# EAGLE board source_eagle (EAGLE 9.3.2)
REV: A
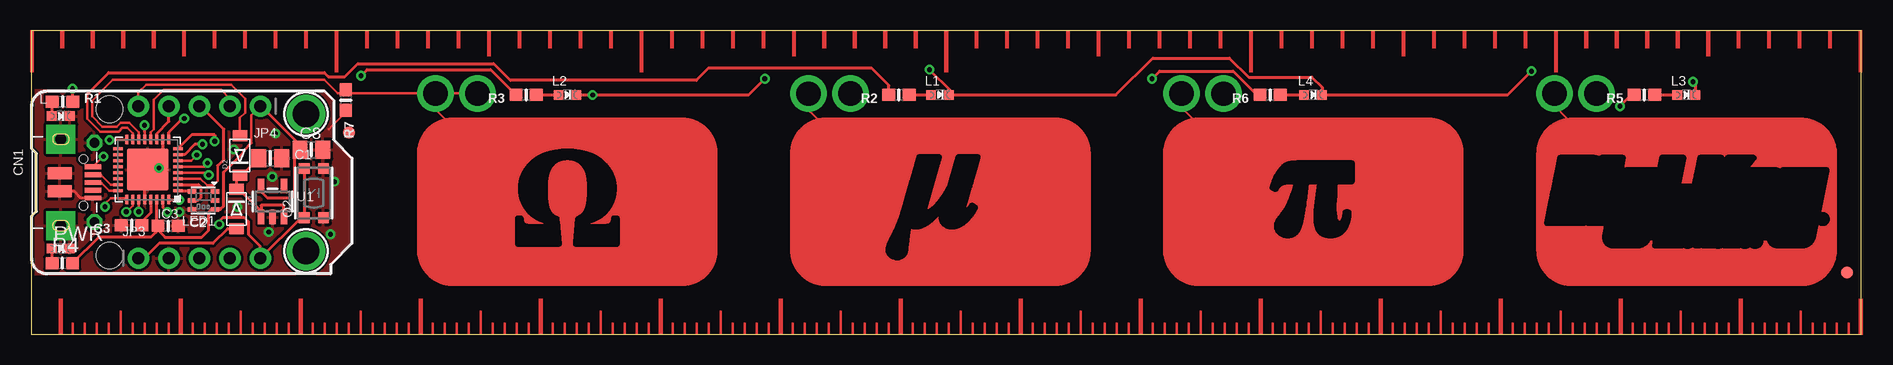
[diagram p0: board, top side]
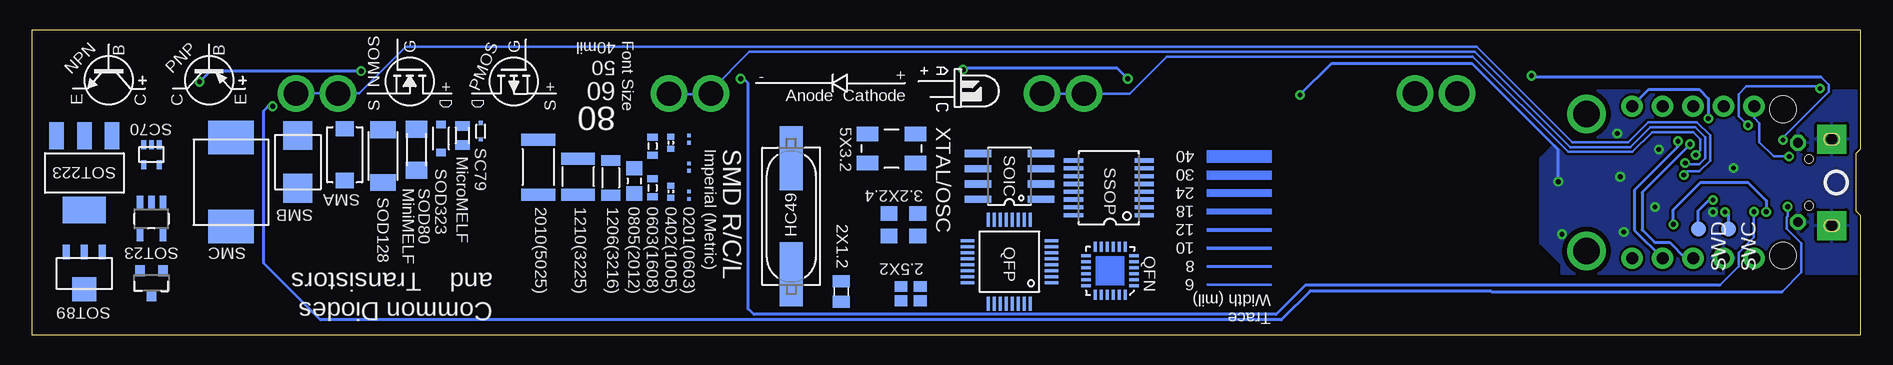
[diagram p1: board, bottom side, seen from below]

Size 152.4 x 25.4 mm. Coordinates in mm from the lower left corner, seen from the top.
Outline: 0,0 0,9.91 0.38,10.29 0.38,15.11 0,15.49 0,25.4 152.4,25.4 152.4,0 0,0
Copper layers (1*16): Top 0.035mm / dielectric 1.5mm / Bottom 0.035mm
Design rules "adafruit_rules_1": minimum track width 8mil, minimum drill 15.5mil, track to track 8mil, track to pad 8mil, pad to pad 8mil, via to via 8mil, smd to smd 8mil, copper to edge 10mil, drill to drill 8mil, minimum pad ring 10mil, minimum via ring 8mil, stop-mask expansion 4mil, vias tented up to drill 25mil, thermal gap 10mil
Holes 2.2 mm at 6.48,6.6 6.48,18.8

## Footprints (pad centres in the part's own frame; a part is rotated, then mirrored left to right if it is on the bottom)
0805-NO = smd 1.24 x 1.5: 1 -0.95,0; 2 0.95,0
0603-NO = smd 1.075 x 1: 1 -0.85,0; 2 0.85,0
4UCONN_20329_NARROW = smd 1 x 2: BASE@1 -0.75,-2; BASE@2 0.75,-2 | smd 0.4 x 1.35: D+ 0,0.775; D- -0.65,0.775; GND 1.3,0.775; ID 0.65,0.775; VBUS -1.3,0.775 | drill 0.8 pad 1.27 octagon: SPRT@1 -3.3,0.9; SPRT@2 3.3,0.9 | drill 0.9 pad 2.413 square: SPRT@3 -3.6,-1.9; SPRT@4 3.6,-1.9 | hole 0.7: -1.95,0; 1.95,0
SOD-123FL = smd 0.91 x 1.22: A 1.637,0; C -1.637,0
0201 = smd 0.3 x 0.3: P$1 -0.3,0; P$2 0.3,0
0402 = smd 0.5 x 0.6: 1 -0.5,0; 2 0.5,0
0603 = smd 0.6 x 0.9: 1 -0.75,0; 2 0.75,0
0805 = smd 1.2 x 1.3: 1 -1.05,0; 2 1.05,0
1206 = smd 0.9 x 1.6: 1 -1.45,0; 2 1.45,0
1210 = smd 1 x 2.8: 1 -1.5,0; 2 1.5,0
2010 = smd 1 x 2.8: P$1 -2.3,0; P$2 2.3,0
SOT223 = smd 1.219 x 2.235: 1 -2.311,-3.099; 2 0,-3.099; 3 2.311,-3.099 | smd 3.6 x 2.2: 4 0,3.099
SOT89 = smd 0.58 x 1.2: 1 -1.5,-1.8; 2 0,-1.8; 3 1.5,-1.8 | smd 2 x 2: 4 0,1.3
SOT23-5 = smd 0.55 x 1.2: 1 -0.95,-1.3; 2 0,-1.3; 3 0.95,-1.3; 4 0.95,1.3; 5 -0.95,1.3
SOT23-3 = smd 0.8 x 0.9: 1 -0.95,-1; 2 0.95,-1; 3 0,1.1
SC70 = smd 0.4 x 0.75: 1 -0.65,-0.825; 2 0,-0.825; 3 0.65,-0.825; 4 0.65,0.825; 5 -0.65,0.825
CRYSTAL-SMD-5X3.2 = smd 1.8 x 1.2: 1 -2,-1.2; 2 2,-1.2; 3 2,1.2; 4 -2,1.2
CRYSTAL-SMD-3.2X2.5 = smd 1.4 x 1.2: 1 -1.2,-0.95; 2 1.2,-0.95; 3 1.2,0.95; 4 -1.2,0.95
CRYSTAL-SMD-2.5X2 = smd 1.05 x 0.9: 1 -0.795,-0.6; 2 0.795,-0.6; 3 0.795,0.6; 4 -0.795,0.6
HC49UP = smd 5.334 x 1.93: 1 -4.826,0; 2 4.826,0
XTAL-2X1.2 = smd 1 x 1.4: P$1 -0.85,0; P$2 0.85,0
MICROMELF-R = smd 0.8 x 1.2: A 0.8,0; C -0.8,0
SC79_INFINEON = smd 0.35 x 0.35: A 0.675,0; C -0.675,0
SMA-DIODE = smd 1.27 x 1.47: A -2.15,0; C 2.15,0
SMB-DIODE = smd 2.4 x 2.4: A 2.2,0; C -2.2,0
SMC = smd 2.8 x 3.8: A 3.7,0; C -3.7,0
SOD-128 = smd 1.4 x 2.1: A 2.2,0; C -2.2,0
SOD-323 = smd 0.63 x 0.83: 1 -1.15,0; 2 1.15,0
SOD80C = smd 1.4 x 1.8: A 1.7,0; C -1.7,0
QFN-24 = smd 0.8 x 0.25: 1 -2,1.25; 2 -2,0.75; 3 -2,0.25; 4 -2,-0.25; 5 -2,-0.75; 6 -2,-1.25; 13 2,-1.25; 14 2,-0.75; 15 2,-0.25; 16 2,0.25; 17 2,0.75; 18 2,1.25 | smd 0.25 x 0.8: 7 -1.25,-2; 8 -0.75,-2; 9 -0.25,-2; 10 0.25,-2; 11 0.75,-2; 12 1.25,-2; 19 1.25,2; 20 0.75,2; 21 0.25,2; 22 -0.25,2; 23 -0.75,2; 24 -1.25,2
TSSOP16 = smd 0.35 x 1.6: 1 -2.225,-2.85; 2 -1.575,-2.85; 3 -0.925,-2.85; 4 -0.275,-2.85; 5 0.375,-2.85; 6 1.025,-2.85; 7 1.675,-2.85; 8 2.325,-2.85; 9 2.325,3.05; 10 1.675,3.05; 11 1.025,3.05; 12 0.375,3.05; 13 -0.275,3.05; 14 -0.925,3.05; 15 -1.575,3.05; 16 -2.225,3.05
SO08 = smd 0.61 x 2.21: 1 -1.905,-2.616; 2 -0.635,-2.616; 3 0.635,-2.616; 4 1.905,-2.616; 5 1.905,2.616; 6 0.635,2.616; 7 -0.635,2.616; 8 -1.905,2.616
TQFP32-5MM = smd 1.143 x 0.254: 1 -3.5,1.75; 2 -3.5,1.25; 3 -3.5,0.75; 4 -3.5,0.25; 5 -3.5,-0.25; 6 -3.5,-0.75; 7 -3.5,-1.25; 8 -3.5,-1.75; 17 3.5,-1.75; 18 3.5,-1.25; 19 3.5,-0.75; 20 3.5,-0.25; 21 3.5,0.25; 22 3.5,0.75; 23 3.5,1.25; 24 3.5,1.75 | smd 0.254 x 1.143: 9 -1.75,-3.5; 10 -1.25,-3.5; 11 -0.75,-3.5; 12 -0.25,-3.5; 13 0.25,-3.5; 14 0.75,-3.5; 15 1.25,-3.5; 16 1.75,-3.5; 25 1.75,3.5; 26 1.25,3.5; 27 0.75,3.5; 28 0.25,3.5; 29 -0.25,3.5; 30 -0.75,3.5; 31 -1.25,3.5; 32 -1.75,3.5
QFN32_5MM = smd 0.8 x 0.25: 1 -2.5,1.75; 2 -2.5,1.25; 3 -2.5,0.75; 4 -2.5,0.25; 5 -2.5,-0.25; 6 -2.5,-0.75; 7 -2.5,-1.25; 8 -2.5,-1.75; 17 2.5,-1.75; 18 2.5,-1.25; 19 2.5,-0.75; 20 2.5,-0.25; 21 2.5,0.25; 22 2.5,0.75; 23 2.5,1.25; 24 2.5,1.75 | smd 0.25 x 0.8: 9 -1.75,-2.5; 10 -1.25,-2.5; 11 -0.75,-2.5; 12 -0.25,-2.5; 13 0.25,-2.5; 14 0.75,-2.5; 15 1.25,-2.5; 16 1.75,-2.5; 25 1.75,2.5; 26 1.25,2.5; 27 0.75,2.5; 28 0.25,2.5; 29 -0.25,2.5; 30 -0.75,2.5; 31 -1.25,2.5; 32 -1.75,2.5 | smd 3.5 x 3.5: 33 0,0
1X05_ROUND_70 = drill 1 pad 1.778: 1 -5.08,0; 2 -2.54,0; 3 0,0; 4 2.54,0; 5 5.08,0
CHIPLED_0603_NOOUTLINE = smd 0.8 x 0.8: A 0,-0.75; C 0,0.75
APA102_2020 = smd 0.7 x 0.35: 1 -0.95,-0.75; 2 -0.95,0; 3 -0.95,0.75; 4 0.95,0.75; 5 0.95,0; 6 0.95,-0.75
BTN_KMR2_4.6X2.8 = smd 0.9 x 0.9: A 2.05,0.8; A' -2.05,0.8; B 2.05,-0.8; B' -2.05,-0.8
B1,27 = smd 1.27 x 1.27: TP 0,0
FIDUCIAL_1MM = smd 1 x 1: 1 0,0
MOUNTINGHOLE_2.0_PLATED = drill 2.2 pad 3: P$1 0,0

## Placement (x,y rotation side)
C1  10uF  [0805-NO]  19.88,14.73 0 top
C2  1uF  [0603-NO]  11.37,9.08 0 top
C3  1uF  [0603-NO]  8.32,9.14 180 top
C8  10uF  [0805-NO]  23.3,15.43 0 top
CN1  4U#20329  [4UCONN_20329_NARROW]  4.32,12.7 270 top
D2  SCHOTTKY  [SOD-123FL]  17.34,14.94 90 top
D3  SCHOTTKY  [SOD-123FL]  17.06,10.49 270 top
E$1  [EDGE-MILLIMETERS]  2.41,0 0 top
E$2  [EDGE-MILLIMETERS]  12.41,0 0 top
E$3  [EDGE-MILLIMETERS]  22.41,0 0 top
E$4  [EDGE-MILLIMETERS]  32.41,0 0 top
E$5  [EDGE-MILLIMETERS]  42.41,0 0 top
E$6  [EDGE-MILLIMETERS]  52.41,0 0 top
E$7  [EDGE-MILLIMETERS]  62.41,0 0 top
E$8  [EDGE-MILLIMETERS]  72.41,0 0 top
E$9  [EDGE-MILLIMETERS]  82.41,0 0 top
E$10  [EDGE-MILLIMETERS]  92.41,0 0 top
E$11  [EDGE-MILLIMETERS]  102.41,0 0 top
E$12  [EDGE-MILLIMETERS]  112.41,0 0 top
E$13  [EDGE-MILLIMETERS]  122.41,0 0 top
E$14  [EDGE-MILLIMETERS]  132.41,0 0 top
E$15  [EDGE-MILLIMETERS]  142.41,0 0 top
E$16  [0201]  97.64,11.63 270 bottom
E$17  [EDGE-INCHES-TENTH]  0,25.4 0 top
E$18  [EDGE-INCHES-TENTH]  25.4,25.4 0 top
E$19  [EDGE-INCHES-TENTH]  50.8,25.4 0 top
E$20  [EDGE-INCHES-TENTH]  76.2,25.4 0 top
E$21  [EDGE-INCHES-TENTH]  101.6,25.4 0 top
E$22  [EDGE-INCHES-TENTH]  127,25.4 0 top
E$23  [0402]  99.16,11.94 270 bottom
E$24  [0603]  100.69,12.24 270 bottom
E$25  [0805]  102.21,12.83 270 bottom
E$26  [1206]  104.17,13.08 270 bottom
E$27  [1210]  106.88,13.18 90 bottom
E$28  [2010]  110.21,13.97 270 bottom
E$31  [SOT223]  148.03,13.49 180 bottom
E$32  [SOT89]  148.03,5.11 180 bottom
E$33  [SOT23-5]  142.44,9.68 180 bottom
E$34  [SOT23-3]  142.44,4.34 180 bottom
E$35  [SC70]  142.44,15.01 180 bottom
E$36  [CRYSTAL-SMD-5X3.2]  80.77,15.52 0 bottom
E$37  [CRYSTAL-SMD-3.2X2.5]  79.78,9.17 0 bottom
E$38  [CRYSTAL-SMD-2.5X2]  79.17,3.43 0 bottom
E$39  [HC49UP]  89.13,9.88 270 bottom
E$40  [XTAL-2X1.2]  84.96,3.61 270 bottom
E$41  [MICROMELF-R]  116.54,16.61 270 bottom
E$42  [SC79_INFINEON]  115.01,16.97 270 bottom
E$43  [SMA-DIODE]  126.34,15.01 90 bottom
E$44  [SMB-DIODE]  130.25,14.4 270 bottom
E$45  [SMC]  135.81,12.73 270 bottom
E$47  [SOD-128]  123.14,14.88 270 bottom
E$48  [SOD-323]  118.31,16.36 90 bottom
E$49  [SOD80C]  120.35,15.42 270 bottom
E$50  [NMOS-SYMB]  120.93,21.11 270 bottom
E$51  [PMOS-SYMB]  112.24,21.11 270 bottom
E$52  [DIODE-SYMB]  85.06,20.47 180 bottom
E$53  [LED-GUIDE]  75.54,20.02 270 bottom
E$54  [NPN-SYMB]  146,21.21 270 bottom
E$55  [QFN-24]  62.56,5.33 180 bottom
E$56  [TSSOP16]  62.56,12.19 90 bottom
E$57  [SO08]  70.94,13.21 90 bottom
E$58  [TQFP32-5MM]  70.94,6.1 180 bottom
E$59  [PNP-SYMB]  137.64,21.21 270 bottom
E$60  [0201]  97.64,16.31 270 bottom
E$61  [0402]  99.16,16 270 bottom
E$62  [0603]  100.69,15.72 270 bottom
E$63  [0201]  97.64,13.97 270 bottom
IC3  ATSAMD21E  [QFN32_5MM]  9.67,13.77 180 top
JP3  [1X05_ROUND_70]  13.97,6.38 0 top
JP4  [1X05_ROUND_70]  13.97,19.05 180 top
L  red  [CHIPLED_0603_NOOUTLINE]  2.41,18.22 270 top
L1  yellow  [CHIPLED_0603_NOOUTLINE]  75.69,19.99 270 top
L2  red  [CHIPLED_0603_NOOUTLINE]  44.63,19.99 270 top
L3  blue  [CHIPLED_0603_NOOUTLINE]  137.87,19.99 270 top
L4  green  [CHIPLED_0603_NOOUTLINE]  106.78,19.99 270 top
LED1  AP102-2020  [APA102_2020]  14.3,11.2 180 top
PWR  green  [CHIPLED_0603_NOOUTLINE]  2.41,7.18 270 top
Q2  reset  [BTN_KMR2_4.6X2.8]  23.5,11.81 90 top
R1  2.2K  [0603-NO]  2.57,19.43 0 top
R2  2.2K  [0603-NO]  72.26,19.99 180 top
R3  2.2K  [0603-NO]  41.2,19.99 180 top
R4  10K  [0603-NO]  2.54,5.97 0 top
R5  10K  [0603-NO]  134.39,19.99 180 top
R6  10K  [0603-NO]  103.2,19.99 180 top
R7  2M  [0603-NO]  26.16,19.56 270 top
SWC  TPB1,27  [B1,27]  11.02,8.83 270 bottom
SWD  TPB1,27  [B1,27]  13.53,8.83 270 bottom
U1  AP2112K-3.3  [SOT23-5]  20.07,11.11 0 top
U$1  FIDUCIAL_1MM  [FIDUCIAL_1MM]  151.26,5.21 0 top
U$2  [PYRULER_BOTTOM]  0,25.4 180 bottom
U$6  FIDUCIAL_1MM  [FIDUCIAL_1MM]  26.44,16.85 90 top
U$7  [PCBFEAT-REV-040]  2.03,12.7 180 bottom
U$8  MOUNTINGHOLE2.0  [MOUNTINGHOLE_2.0_PLATED]  22.86,6.99 90 top
U$9  MOUNTINGHOLE2.0  [MOUNTINGHOLE_2.0_PLATED]  22.86,18.41 90 top
U$14  [PYRULER_TOP]  0,0 0 top
U$20  [TRINKET_M0_TOP]  26.67,5.08 90 top

## Library data of the parts
C1-C3 C8 CN1 IC3 JP3 JP4 L L1-L4 LED1 PWR Q2 R1-R7 U1 U$7 = microbuilder
D2 D3 = adafruit
E$1-E$28 E$31-E$45 E$47-E$63 = Reference Ruler
SWC SWD = testpad
U$1 U$6 U$8 U$9 = microbuilder; BOM: EXCLUDE
U$2 U$14 U$20 = silks

## Nets
3.3V: C2.1 C8.1 IC3.9 IC3.30 JP4.1 LED1.3 R4.2 U1.5
!RESET: IC3.26 JP3.5 Q2.A Q2.A'
CAP0: IC3.14 R7.1
CAP1: IC3.6
CAP2: IC3.5
CAP3: IC3.4
D0_A4_PA08_SDA: IC3.11 JP4.4
D1_A0_PA02: IC3.3 JP4.3
D2_A1_PA09_SCL_MISO: IC3.12 JP4.2
D3_A3_PA07_RXD_SCK: IC3.8 JP3.4
D4_A2_PA06_TXD_MOSI: IC3.7 JP3.3
D+: CN1.D+ IC3.24
D-: CN1.D- IC3.23
DOTSTAR_CLOCK: IC3.2 LED1.5
DOTSTAR_DATA: IC3.1 LED1.6
GND: C1.2 C2.2 C3.2 C8.2 CN1.BASE@1 CN1.BASE@2 CN1.GND CN1.SPRT@1 CN1.SPRT@2 CN1.SPRT@3 CN1.SPRT@4 IC3.10 IC3.28 IC3.33 JP3.2 L1.C L2.C L3.C L4.C L.C LED1.4 PWR.C Q2.B Q2.B' R7.2 U1.2
LED: IC3.13 R1.2
LED4: IC3.16 R3.2
LED5: IC3.15 R2.2
LED6: IC3.27 R6.2
LED7: IC3.25 R5.2
N$1: L.A R1.1
N$3: IC3.31 SWC.TP
N$4: IC3.32 SWD.TP
N$6: PWR.A R4.1
N$10: L1.A R2.1
N$11: L2.A R3.1
N$12: L4.A R6.1
N$13: L3.A R5.1
VBAT: D3.A JP3.1
VBUS: CN1.VBUS D2.A JP4.5
VDDCORE: C3.1 IC3.29
VOUT: C1.1 D2.C D3.C U1.1 U1.3

## Tracks (layer width: path | path; a pad name or v marks a point on that pad's centre or on a via)
3.3V  (via drill 0.39)
  Top 0.203: JP4.1 18.29,18.29 18.29,16
  Top 0.254: C2.1 10.52,8.72 10.71,8.53 | 10.71,8.53 11.11,8.13 14.16,8.13 14.73,8.7 14.73,10.22 14.96,10.45 LED1.3 15.72,10.45 15.98,10.71 15.98,13.55 17.65,15.22 17.65,15.36 18.29,15.99 18.29,16 | JP4.1 19.11,19.05 22.36,15.81 C8.1 22.29,15.43 21.92,15.06 21.92,13.27 | C2.1 10.41,8.98 10.41,8.64 9.97,8.19 5.61,8.19 R4.2 | IC3.9 11.42,16.88 12.57,18.03 v12.7,18.03 | IC3.30 10.42,9.24 10.71,8.95 10.71,8.53 | U1.5 19.12,11.92 19.63,11.4 21.72,11.4 21.92,11.61 21.92,13.27 | 21.92,13.27 | 10.3,8.52 10.52,8.74 C2.1
  Bottom 0.254: v12.7,18.03 12.7,19.68 13.46,20.45 17.65,20.45 JP4.1
!RESET  (via drill 0.39)
  Top 0.203: IC3.26 8.42,10.77 8.13,10.48 7.87,10.48 v7.87,10.25
  Top 0.254: v15.62,9.21 15.62,9.46 15.94,9.78 17.7,9.78 18.05,9.44 18.05,8.37 18.99,7.43 18.99,6.44 JP3.5 22.44,9.76 Q2.A' Q2.A
  Bottom 0.254: v15.62,9.21 15.62,10.41 13.34,12.7 9.4,12.7 7.87,11.18 v7.87,10.25
CAP0  (via drill 2.03 pad 1.3)
  Top 0.203: IC3.14 8.92,16.86 8.13,17.65 7.39,17.65 7.08,17.34 5.87,17.34 5.02,18.19 5.02,19.5 6.76,21.23 24.38,21.23 25.5,20.12 26.16,20.12 | 26.16,20.12 v33.63,20.12 v37.13,20.12 | R7.1 26.16,20.12
CAP1  (via drill 0.4, 2.03 pad 1.3)
  Top 0.203: v13.74,14.99 13.28,14.52 IC3.6
  Bottom 0.203: v13.74,14.99 13.36,15.37 13.36,16.29 13.98,16.9 17.39,16.9 19.05,15.24 24.39,15.24 32.33,23.18 57.84,23.18 60.94,20.09 v64.72,20.09 68.2,20.09 v68.22,20.12
CAP2  (via drill 0.4, 2.03 pad 1.3)
  Top 0.203: v14.63,14.32 14.38,14.07 14.43,14.02 IC3.5
  Bottom 0.203: v14.63,14.32 14.51,14.2 13.46,14.2 12.96,14.69 12.96,16.45 13.81,17.3 17.56,17.3 19.22,15.65 24.22,15.65 32.16,23.59 92.62,23.59 95.81,20.4 v95.81,20.12 95.86,20.07 99.29,20.07 v99.31,20.09
CAP3  (via drill 0.4, 2.03 pad 1.3)
  Top 0.203: IC3.4 14.53,13.52 v14.74,13.31
  Bottom 0.203: v14.74,13.31 14.44,13.61 13.46,13.61 12.55,14.53 12.55,16.62 13.65,17.72 17.72,17.72 19.39,16.05 24.05,16.05 32,24 121.23,24 125.12,20.12 v126.9,20.12 v130.4,20.12
D0_A4_PA08_SDA
  Top 0.254: IC3.11 10.42,16.77 11.43,17.78 JP4.4
D1_A0_PA02
  Top 0.203: IC3.3 14.03,13.02 14.61,12.45 15.11,12.45 15.49,12.83 15.49,14.1
  Top 0.254: 15.49,14.1 16,14.61 16,17.14 14.1,19.05 JP4.3
D2_A1_PA09_SCL_MISO
  Top 0.203: JP4.2 16.51,19.68 15.77,20.42 11.01,20.42 10.16,19.58 10.16,17.13 9.92,16.88 IC3.12
D3_A3_PA07_RXD_SCK  (via drill 0.39)
  Top 0.254: v15.24,16.13 15.24,16.66 13.31,16.66 IC3.8
  Bottom 0.254: v15.24,16.13 15.24,15.68 18.86,12.06 18.86,8.72 JP3.4 | JP3.4
D4_A2_PA06_TXD_MOSI  (via drill 0.39)
  Top 0.254: v14.22,15.88 13.59,15.88 12.74,15.02 IC3.7
  Bottom 0.254: JP3.3 14.61,6.38 15.93,7.7 17.18,7.7 18.22,8.74 18.22,11.87 v14.22,15.88
D+
  Top 0.203: IC3.24 6.46,12.02 5.84,12.64 5.16,12.64
  Top 0.254: 5.16,12.64 CN1.D+
D-
  Top 0.203: CN1.D- 5.76,13.35 6.59,12.52 IC3.23
DOTSTAR_CLOCK
  Top 0.254: LED1.5 13.86,11.2 14.1,11.43 14.1,12.32 13.89,12.52 IC3.2
DOTSTAR_DATA
  Top 0.254: IC3.1 13.06,12.02 13.13,11.95 LED1.6
GND  (via drill 0.39, 0.4)
  Top 0.203: R7.2 26.16,18.54 24.77,17.14
  Top 0.254: CN1.GND 4.09,11.4 3.54,11.95 CN1.BASE@2 | IC3.28 9.42,13.52 arc-90 IC3.33 10.47,13.77 v10.6,13.91 10.92,14.22 IC3.10 | L1.C 76.58,19.99 | 76.58,19.99 90.35,19.99 93.42,23.06 99.8,23.06 101.4,21.46 106.68,21.46 107.53,20.61 L4.C 122.99,19.99 v124.97,21.97 | v138.43,21.08 138.62,20.89 L3.C | L2.C v46.74,19.99 59.74,19.99 v61.09,21.34 | v74.8,22.1 76.58,20.32 76.58,19.99
  Bottom 0.254: v124.97,21.97 137.54,21.97 v138.43,21.08 | v61.09,21.34 61.98,22.23 74.68,22.23 v74.8,22.1 | v25.21,12.76 25.21,15.43 32.38,22.61 44.12,22.61 v46.74,19.99
  other vias: 24.89,8.38 19.75,8.57 20.29,16.78 12.32,10.22 16.83,15.43 20.04,13.17 17.14,10.66
  pour Bottom: 0,5.08 24.89,5.08 24.89,5.84 26.67,7.62 26.67,14.73 25.15,16.26 25.15,19.56 25.02,19.68 24.41,20.32 0,20.32
  pour Top: -0.13,5.08 24.89,5.08 24.89,5.84 26.67,7.62 26.67,14.73 25.15,16.26 25.15,19.56 24.41,20.29 24.41,20.32 -0.13,20.32
LED  (via drill 0.39)
  Top 0.203: IC3.13 9.4,16.29 9.4,16.89
  Top 0.254: R1.2 3.42,20.51 v3.39,20.54 | 9.4,16.89 v9.4,17.46
  Bottom 0.203: v3.39,20.54 3.56,20.7 9.53,20.7 10.16,20.07 10.16,18.22 v9.4,17.46
LED4  (via drill 0.4)
  Top 0.203: IC3.16 6.52,16.27 v6.48,16.23
  Top 0.254: v27.43,21.59 27.94,22.1 38.24,22.1 R3.2
  Bottom 0.203: 3.3,21.46 3.3,21.44 2.69,20.83 2.69,20.24 6.48,16.45 v6.48,16.23
  Bottom 0.254: 3.3,21.46 27.3,21.46 v27.43,21.59
LED5
  Top 0.203: IC3.15 8.42,16.79 7.97,17.24 7.55,17.24 7.25,16.93 5.71,16.93 4.62,18.02 4.62,20.05
  Top 0.254: 4.62,20.05 6.41,21.84 24.39,21.84 24.71,21.51 26.09,21.51 27.18,22.61 38.48,22.61 39.88,21.21 55.37,21.21 56.39,22.23 69.98,22.23 71.41,20.79 R2.2
LED6  (via drill 0.4)
  Top 0.203: IC3.27 8.92,10.27 v8.9,10.25
  Top 0.254: v93.34,21.34 93.98,21.97 100.11,21.97 102.1,19.99 R6.2
  Bottom 0.203: 11.74,4.13 10.16,5.71 10.16,6.86 8.9,8.12 v8.9,10.25
  Bottom 0.254: 11.74,4.13 46.29,4.13 48.73,1.69 92.25,1.69 92.71,2.16 92.71,20.95 93.09,21.34 v93.34,21.34
LED7  (via drill 0.4)
  Top 0.203: IC3.25 7.82,11.37 6.57,11.37 6.1,10.9 v6.1,10.67
  Top 0.254: v132.34,19.04 133.29,19.99 R5.2
  Bottom 0.203: v6.1,10.67 6.1,9.88 6.18,9.8 6.18,8.84 4.95,7.62 4.95,5.21 6.56,3.6
  Bottom 0.254: 6.56,3.6 30.77,3.6 30.81,3.63 45.89,3.63 48.28,1.24 128.36,1.24 133.1,5.97 133.1,18.67 132.72,19.05 v132.35,19.05 v132.34,19.04
N$1
  Top 0.254: L.A 1.72,18.28 R1.1
N$2
  Top 0.203: 33.2,19.25 34.47,17.98
N$3  (via drill 0.39)
  Top 0.254: IC3.31 10.92,10.61 v11.3,10.22
  Bottom 0.254: SWC.TP 11.02,10.07 11.18,10.22 v11.3,10.22
N$4  (via drill 0.39)
  Top 0.254: IC3.32 12.29,11.27 v12.32,11.24
  Bottom 0.254: SWD.TP 13.53,10.35 12.64,11.24 v12.32,11.24
N$5
  Top 0.203: 126.77,19.2 128.04,17.93
N$6
  Top 0.254: R4.1 1.69,7.18 PWR.A
N$7
  Top 0.203: 95.89,18.87 96.75,18.01
N$9
  Top 0.203: 64.34,19.1 65.48,17.96
N$10
  Top 0.254: R2.1 L1.A
N$11
  Top 0.254: R3.1 L2.A
N$12
  Top 0.254: R6.1 L4.A
N$13
  Top 0.254: R5.1 L3.A
VBAT
  Top 0.254: JP3.1 9.36,6.38 10.6,7.62 15.09,7.62 16.32,8.85 D3.A
VBUS  (via drill 0.4)
  Top 0.203: JP4.5 8.89,20.19 9.53,20.83 16.64,20.83 17.78,19.68 17.78,18.52 17.34,18.08 D2.A | CN1.VBUS 5.95,14.86 v5.97,14.86
  Bottom 0.203: v5.97,14.86 7.24,14.86 8.44,16.06 8.44,17.63 8.89,18.08 JP4.5
VDDCORE
  Top 0.254: IC3.29 9.92,10.17 9.17,9.42 C3.1
VOUT
  Top 0.254: U1.3 21.02,10.78 19.11,10.78 U1.1 19.12,10.28 17.06,12.34 D3.C 17.06,13.02 D2.C 17.49,13.3 C1.1
(copper drawn outside any net)
  shapes: Bottom area x8

## Text on the board
bPlace: Font Size | 40mil | 50 | 60 | 80 | SC70 | XTAL/OSC | 5X3.2 | SC79 | 40 | SOIC | SMD R/C/L | Imperial (Metric) | MicroMELF | 30 | SSOP | SOD323 | SOT223 | 24 | 3.2X2.4 | SOD80 | MiniMELF | SMA | 18 | 0201(0603) / 0402(1005) / 0603(1608) / 0805(2012) | 1206(3216) | 1210(3225) | 2010(5025) | SOD128 | SMB | 12 | 2X1.2 | 10 | HC49 | QFN | QFP | SMC | SOT23 | 8 | 2.5X2 | 6 | Common Diodes / and Transistors | Trace / Width (mil) | SOT89